# EAGLE board Micro_QWERTY_Stencil (EAGLE 9.1.3)

Size 120 x 40 mm. Coordinates in mm from the lower left corner, seen from the top.
Outline: 40,0 120,0 120,40 80,40 0,40 0,0 40,0
Copper layers (1*16): Top 0.035mm / dielectric 1.5mm / Bottom 0.035mm
Design rules "SeeedStudio_2layer_DRU_no_angle_20140221_IMD555 *": minimum track width 0.2mm, minimum drill 0.3mm, track to track 0.2mm, track to pad 0.16mm, pad to pad 0.2mm, via to via 0.2mm, smd to smd 0mil, copper to edge 0.2mm, drill to drill 10mil, minimum pad ring 0.2mm, minimum via ring 0.2mm, stop-mask expansion 0.03mm, vias tented up to drill 5mm, thermal gap 10mil

## Footprints (pad centres in the part's own frame; a part is rotated, then mirrored left to right if it is on the bottom)
TVAU10-025 = smd 1.1 x 0.7: P$1 -2.05,1.05; P$2 2.05,1.05; P$3 -2.05,-1.05; P$4 2.05,-1.05

## Placement (x,y rotation side)
SW1  SKRP(ALPS)  [TVAU10-025]  111.5,38.15 180 top
SW2  SW_4PTVAU10-025  [TVAU10-025]  105.75,38.15 180 top
SW3  SW_4PTVAU10-025  [TVAU10-025]  100,38.15 180 top
SW4  SW_4PTVAU10-025  [TVAU10-025]  94.25,38.15 180 top
SW5  SW_4PTVAU10-025  [TVAU10-025]  88.5,38.15 180 top
SW6  SW_4PTVAU10-025  [TVAU10-025]  111.5,34.85 180 top
SW7  SW_4PTVAU10-025  [TVAU10-025]  105.75,34.85 180 top
SW8  SW_4PTVAU10-025  [TVAU10-025]  100,34.85 180 top
SW9  SW_4PTVAU10-025  [TVAU10-025]  94.25,34.85 180 top
SW10  SW_4PTVAU10-025  [TVAU10-025]  88.5,34.85 180 top
SW11  SW_4PTVAU10-025  [TVAU10-025]  111.7,31.55 180 top
SW12  SW_4PTVAU10-025  [TVAU10-025]  105.95,31.55 180 top
SW13  SW_4PTVAU10-025  [TVAU10-025]  100.2,31.55 180 top
SW14  SW_4PTVAU10-025  [TVAU10-025]  94.45,31.55 180 top
SW15  SW_4PTVAU10-025  [TVAU10-025]  88.7,31.55 180 top
SW16  SW_4PTVAU10-025  [TVAU10-025]  82.95,31.55 180 top
SW17  SW_4PTVAU10-025  [TVAU10-025]  111.7,28.25 180 top
SW18  SW_4PTVAU10-025  [TVAU10-025]  105.95,28.25 180 top
SW19  SW_4PTVAU10-025  [TVAU10-025]  100.2,28.25 180 top
SW20  SW_4PTVAU10-025  [TVAU10-025]  94.45,28.25 180 top
SW21  SW_4PTVAU10-025  [TVAU10-025]  88.7,28.25 180 top
SW22  SW_4PTVAU10-025  [TVAU10-025]  82.95,28.25 180 top
SW23  SW_4PTVAU10-025  [TVAU10-025]  111.7,24.95 180 top
SW24  SW_4PTVAU10-025  [TVAU10-025]  105.95,24.95 180 top
SW25  SW_4PTVAU10-025  [TVAU10-025]  100.2,24.95 180 top
SW26  SW_4PTVAU10-025  [TVAU10-025]  94.45,24.95 180 top
SW27  SW_4PTVAU10-025  [TVAU10-025]  88.7,24.95 180 top
SW28  SW_4PTVAU10-025  [TVAU10-025]  82.95,24.95 180 top
SW29  SW_4PTVAU10-025  [TVAU10-025]  111.7,21.65 180 top
SW30  SW_4PTVAU10-025  [TVAU10-025]  105.95,21.65 180 top
SW31  SW_4PTVAU10-025  [TVAU10-025]  100.2,21.65 180 top
SW32  SW_4PTVAU10-025  [TVAU10-025]  94.45,21.65 180 top
SW33  SW_4PTVAU10-025  [TVAU10-025]  88.7,21.65 180 top
SW34  SW_4PTVAU10-025  [TVAU10-025]  82.95,21.65 180 top
SW35  SW_4PTVAU10-025  [TVAU10-025]  111.7,18.35 180 top
SW36  SW_4PTVAU10-025  [TVAU10-025]  105.95,18.35 180 top
SW37  SW_4PTVAU10-025  [TVAU10-025]  100.2,18.35 180 top
SW38  SW_4PTVAU10-025  [TVAU10-025]  94.45,18.35 180 top
SW39  SW_4PTVAU10-025  [TVAU10-025]  88.7,18.35 180 top
SW40  SW_4PTVAU10-025  [TVAU10-025]  82.95,18.35 180 top
SW41  SW_4PTVAU10-025  [TVAU10-025]  111.7,15.05 180 top
SW42  SW_4PTVAU10-025  [TVAU10-025]  105.95,15.05 180 top
SW43  SW_4PTVAU10-025  [TVAU10-025]  100.2,15.05 180 top
SW44  SW_4PTVAU10-025  [TVAU10-025]  94.45,15.05 180 top
SW45  SW_4PTVAU10-025  [TVAU10-025]  88.7,15.05 180 top
SW46  SW_4PTVAU10-025  [TVAU10-025]  82.95,15.05 180 top
SW47  SW_4PTVAU10-025  [TVAU10-025]  111.7,11.75 180 top
SW48  SW_4PTVAU10-025  [TVAU10-025]  105.95,11.75 180 top
SW49  SW_4PTVAU10-025  [TVAU10-025]  100.2,11.75 180 top
SW50  SW_4PTVAU10-025  [TVAU10-025]  94.45,11.75 180 top
SW51  SW_4PTVAU10-025  [TVAU10-025]  88.7,11.75 180 top
SW52  SW_4PTVAU10-025  [TVAU10-025]  82.95,11.75 180 top
SW53  SW_4PTVAU10-025  [TVAU10-025]  111.7,8.45 180 top
SW54  SW_4PTVAU10-025  [TVAU10-025]  105.95,8.45 180 top
SW55  SW_4PTVAU10-025  [TVAU10-025]  100.2,8.45 180 top
SW56  SW_4PTVAU10-025  [TVAU10-025]  94.45,8.45 180 top
SW57  SW_4PTVAU10-025  [TVAU10-025]  88.7,8.45 180 top
SW58  SW_4PTVAU10-025  [TVAU10-025]  82.95,8.45 180 top
SW59  SW_4PTVAU10-025  [TVAU10-025]  111.5,5.15 180 top
SW60  SW_4PTVAU10-025  [TVAU10-025]  105.75,5.15 180 top
SW61  SW_4PTVAU10-025  [TVAU10-025]  100,5.15 180 top
SW62  SW_4PTVAU10-025  [TVAU10-025]  94.25,5.15 180 top
SW63  SW_4PTVAU10-025  [TVAU10-025]  88.5,5.15 180 top
SW64  SW_4PTVAU10-025  [TVAU10-025]  111.5,1.85 180 top
SW65  SW_4PTVAU10-025  [TVAU10-025]  105.75,1.85 180 top
SW66  SW_4PTVAU10-025  [TVAU10-025]  100,1.85 180 top
SW67  SW_4PTVAU10-025  [TVAU10-025]  94.25,1.85 180 top
SW68  SW_4PTVAU10-025  [TVAU10-025]  88.5,1.85 180 top
SW101  SW_4PTVAU10-025  [TVAU10-025]  8.5,38.15 0 top
SW102  SW_4PTVAU10-025  [TVAU10-025]  8.5,34.85 0 top
SW103  SW_4PTVAU10-025  [TVAU10-025]  8.3,31.55 0 top
SW104  SW_4PTVAU10-025  [TVAU10-025]  8.3,28.25 0 top
SW105  SW_4PTVAU10-025  [TVAU10-025]  8.3,24.95 0 top
SW106  SW_4PTVAU10-025  [TVAU10-025]  8.3,21.65 0 top
SW107  SW_4PTVAU10-025  [TVAU10-025]  8.3,18.35 0 top
SW108  SW_4PTVAU10-025  [TVAU10-025]  8.3,15.05 0 top
SW109  SW_4PTVAU10-025  [TVAU10-025]  8.3,11.75 0 top
SW110  SW_4PTVAU10-025  [TVAU10-025]  8.3,8.45 0 top
SW111  SW_4PTVAU10-025  [TVAU10-025]  8.5,5.15 0 top
SW112  SKRP(ALPS)  [TVAU10-025]  8.5,1.85 0 top
SW113  SW_4PTVAU10-025  [TVAU10-025]  14.25,38.15 0 top
SW114  SW_4PTVAU10-025  [TVAU10-025]  14.25,34.85 0 top
SW115  SW_4PTVAU10-025  [TVAU10-025]  14.05,31.55 0 top
SW116  SW_4PTVAU10-025  [TVAU10-025]  14.05,28.25 0 top
SW117  SW_4PTVAU10-025  [TVAU10-025]  14.05,24.95 0 top
SW118  SW_4PTVAU10-025  [TVAU10-025]  14.05,21.65 0 top
SW119  SW_4PTVAU10-025  [TVAU10-025]  14.05,18.35 0 top
SW120  SW_4PTVAU10-025  [TVAU10-025]  14.05,15.05 0 top
SW121  SW_4PTVAU10-025  [TVAU10-025]  14.05,11.75 0 top
SW122  SW_4PTVAU10-025  [TVAU10-025]  14.05,8.45 0 top
SW123  SW_4PTVAU10-025  [TVAU10-025]  14.25,5.15 0 top
SW124  SW_4PTVAU10-025  [TVAU10-025]  14.25,1.85 0 top
SW125  SW_4PTVAU10-025  [TVAU10-025]  20,38.15 0 top
SW126  SW_4PTVAU10-025  [TVAU10-025]  20,34.85 0 top
SW127  SW_4PTVAU10-025  [TVAU10-025]  19.8,31.55 0 top
SW128  SW_4PTVAU10-025  [TVAU10-025]  19.8,28.25 0 top
SW129  SW_4PTVAU10-025  [TVAU10-025]  19.8,24.95 0 top
SW130  SW_4PTVAU10-025  [TVAU10-025]  19.8,21.65 0 top
SW131  SW_4PTVAU10-025  [TVAU10-025]  19.8,18.35 0 top
SW132  SW_4PTVAU10-025  [TVAU10-025]  19.8,15.05 0 top
SW133  SW_4PTVAU10-025  [TVAU10-025]  19.8,11.75 0 top
SW134  SW_4PTVAU10-025  [TVAU10-025]  19.8,8.45 0 top
SW135  SW_4PTVAU10-025  [TVAU10-025]  20,5.15 0 top
SW136  SW_4PTVAU10-025  [TVAU10-025]  20,1.85 0 top
SW137  SW_4PTVAU10-025  [TVAU10-025]  25.75,38.15 0 top
SW138  SW_4PTVAU10-025  [TVAU10-025]  25.75,34.85 0 top
SW139  SW_4PTVAU10-025  [TVAU10-025]  25.55,31.55 0 top
SW140  SW_4PTVAU10-025  [TVAU10-025]  25.55,28.25 0 top
SW141  SW_4PTVAU10-025  [TVAU10-025]  25.55,24.95 0 top
SW142  SW_4PTVAU10-025  [TVAU10-025]  25.55,21.65 0 top
SW143  SW_4PTVAU10-025  [TVAU10-025]  25.55,18.35 0 top
SW144  SW_4PTVAU10-025  [TVAU10-025]  25.55,15.05 0 top
SW145  SW_4PTVAU10-025  [TVAU10-025]  25.55,11.75 0 top
SW146  SW_4PTVAU10-025  [TVAU10-025]  25.55,8.45 0 top
SW147  SW_4PTVAU10-025  [TVAU10-025]  25.75,5.15 0 top
SW148  SW_4PTVAU10-025  [TVAU10-025]  25.75,1.85 0 top
SW149  SW_4PTVAU10-025  [TVAU10-025]  31.5,38.15 0 top
SW150  SW_4PTVAU10-025  [TVAU10-025]  31.5,34.85 0 top
SW151  SW_4PTVAU10-025  [TVAU10-025]  31.3,31.55 0 top
SW152  SW_4PTVAU10-025  [TVAU10-025]  31.3,28.25 0 top
SW153  SW_4PTVAU10-025  [TVAU10-025]  31.3,24.95 0 top
SW154  SW_4PTVAU10-025  [TVAU10-025]  31.3,21.65 0 top
SW155  SW_4PTVAU10-025  [TVAU10-025]  31.3,18.35 0 top
SW156  SW_4PTVAU10-025  [TVAU10-025]  31.3,15.05 0 top
SW157  SW_4PTVAU10-025  [TVAU10-025]  31.3,11.75 0 top
SW158  SW_4PTVAU10-025  [TVAU10-025]  31.3,8.45 0 top
SW159  SW_4PTVAU10-025  [TVAU10-025]  31.5,5.15 0 top
SW160  SW_4PTVAU10-025  [TVAU10-025]  31.5,1.85 0 top
SW163  SW_4PTVAU10-025  [TVAU10-025]  37.05,31.55 0 top
SW164  SW_4PTVAU10-025  [TVAU10-025]  37.05,28.25 0 top
SW165  SW_4PTVAU10-025  [TVAU10-025]  37.05,24.95 0 top
SW166  SW_4PTVAU10-025  [TVAU10-025]  37.05,21.65 0 top
SW167  SW_4PTVAU10-025  [TVAU10-025]  37.05,18.35 0 top
SW168  SW_4PTVAU10-025  [TVAU10-025]  37.05,15.05 0 top
SW169  SW_4PTVAU10-025  [TVAU10-025]  37.05,11.75 0 top
SW170  SW_4PTVAU10-025  [TVAU10-025]  37.05,8.45 0 top

## Library data of the parts
SW1-SW68 SW101-SW160 SW163-SW170 = 0 my parts

## Nets
C0: SW112.P$2 SW124.P$1
C1: SW111.P$2 SW123.P$1
C2: SW122.P$2 SW134.P$1
C3: SW121.P$2 SW133.P$1
C4: SW120.P$2 SW132.P$1
C5: SW119.P$2 SW131.P$1
C6: SW118.P$4 SW130.P$3
C7: SW117.P$4 SW129.P$3
C8: SW116.P$4 SW128.P$3
C9: SW115.P$4 SW127.P$3
C10: SW102.P$4 SW114.P$3
C11: SW101.P$4 SW113.P$3
C12: SW1.P$2 SW2.P$1
C13: SW6.P$2 SW7.P$1
C14: SW12.P$2 SW13.P$1
C15: SW18.P$2 SW19.P$1
C16: SW24.P$2 SW25.P$1
C17: SW30.P$2 SW31.P$1
C18: SW36.P$4 SW37.P$3
C19: SW42.P$4 SW43.P$3
C20: SW48.P$4 SW49.P$3
C21: SW54.P$4 SW55.P$3
C22: SW59.P$4 SW60.P$3
C23: SW64.P$4 SW65.P$3
N$5: SW123.P$2 SW135.P$1
N$7: SW114.P$4 SW126.P$3
N$94: SW7.P$2 SW8.P$1
N$96: SW60.P$4 SW61.P$3
R0: SW101.P$1 SW102.P$1 SW103.P$1 SW104.P$1 SW105.P$1 SW106.P$1 SW107.P$3 SW108.P$3 SW109.P$3 SW110.P$3 SW111.P$3 SW112.P$3
R1: SW113.P$1 SW114.P$1 SW115.P$1 SW116.P$1 SW117.P$1 SW118.P$1 SW119.P$3 SW120.P$3 SW121.P$3 SW122.P$3 SW123.P$3 SW124.P$3
R2: SW125.P$1 SW126.P$1 SW127.P$1 SW128.P$1 SW129.P$1 SW130.P$1 SW131.P$3 SW132.P$3 SW133.P$3 SW134.P$3 SW135.P$3 SW136.P$3
R3: SW137.P$1 SW138.P$1 SW139.P$1 SW140.P$1 SW141.P$1 SW142.P$1 SW143.P$3 SW144.P$3 SW145.P$3 SW146.P$3 SW147.P$3 SW148.P$3
R4: SW149.P$1 SW150.P$1 SW151.P$1 SW152.P$1 SW153.P$1 SW154.P$1 SW155.P$3 SW156.P$3 SW157.P$3 SW158.P$3 SW159.P$3 SW160.P$3
R5: SW163.P$1 SW164.P$1 SW165.P$1 SW166.P$1 SW167.P$3 SW168.P$3 SW169.P$3 SW170.P$3
R6: SW1.P$3 SW6.P$3 SW11.P$3 SW17.P$3 SW23.P$3 SW29.P$3 SW35.P$1 SW41.P$1 SW47.P$1 SW53.P$1 SW59.P$1 SW64.P$1
R7: SW2.P$3 SW7.P$3 SW12.P$3 SW18.P$3 SW24.P$3 SW30.P$3 SW36.P$1 SW42.P$1 SW48.P$1 SW54.P$1 SW60.P$1 SW65.P$1
R8: SW3.P$3 SW8.P$3 SW13.P$3 SW19.P$3 SW25.P$3 SW31.P$3 SW37.P$1 SW43.P$1 SW49.P$1 SW55.P$1 SW61.P$1 SW66.P$1
R9: SW4.P$3 SW9.P$3 SW14.P$3 SW20.P$3 SW26.P$3 SW32.P$3 SW38.P$1 SW44.P$1 SW50.P$1 SW56.P$1 SW62.P$1 SW67.P$1
R10: SW5.P$3 SW10.P$3 SW15.P$3 SW21.P$3 SW27.P$3 SW33.P$3 SW39.P$1 SW45.P$1 SW51.P$1 SW57.P$1 SW63.P$1 SW68.P$1
R11: SW16.P$3 SW22.P$3 SW28.P$3 SW34.P$3 SW40.P$1 SW46.P$1 SW52.P$1 SW58.P$1

## Tracks (layer width: path | path; a pad name or v marks a point on that pad's centre or on a via)
C0  (3 unrouted)
C1  (2 unrouted)
C2  (2 unrouted)
C3  (2 unrouted)
C4  (2 unrouted)
C5  (2 unrouted)
C6  (2 unrouted)
C7  (2 unrouted)
C8  (2 unrouted)
C9  (2 unrouted)
C10  (2 unrouted)
C11  (3 unrouted)
C12  (3 unrouted)
C13  (2 unrouted)
C14  (2 unrouted)
C15  (2 unrouted)
C16  (2 unrouted)
C17  (2 unrouted)
C18  (2 unrouted)
C19  (2 unrouted)
C20  (2 unrouted)
C21  (2 unrouted)
C22  (2 unrouted)
C23  (3 unrouted)
GND  (23 unrouted)
GND1  (23 unrouted)
N$1  (1 unrouted)
N$2  (2 unrouted)
N$3  (1 unrouted)
N$4  (1 unrouted)
N$5  (2 unrouted)
N$7  (2 unrouted)
N$65  (1 unrouted)
N$66  (2 unrouted)
N$67  (1 unrouted)
N$69  (1 unrouted)
N$94  (2 unrouted)
N$96  (2 unrouted)
R0  (12 unrouted)
R1  (12 unrouted)
R2  (12 unrouted)
R3  (12 unrouted)
R4  (12 unrouted)
R5  (11 unrouted)
R6  (12 unrouted)
R7  (12 unrouted)
R8  (12 unrouted)
R9  (12 unrouted)
R10  (12 unrouted)
R11  (11 unrouted)